# EAGLE board transmitter (EAGLE 7.2.0)
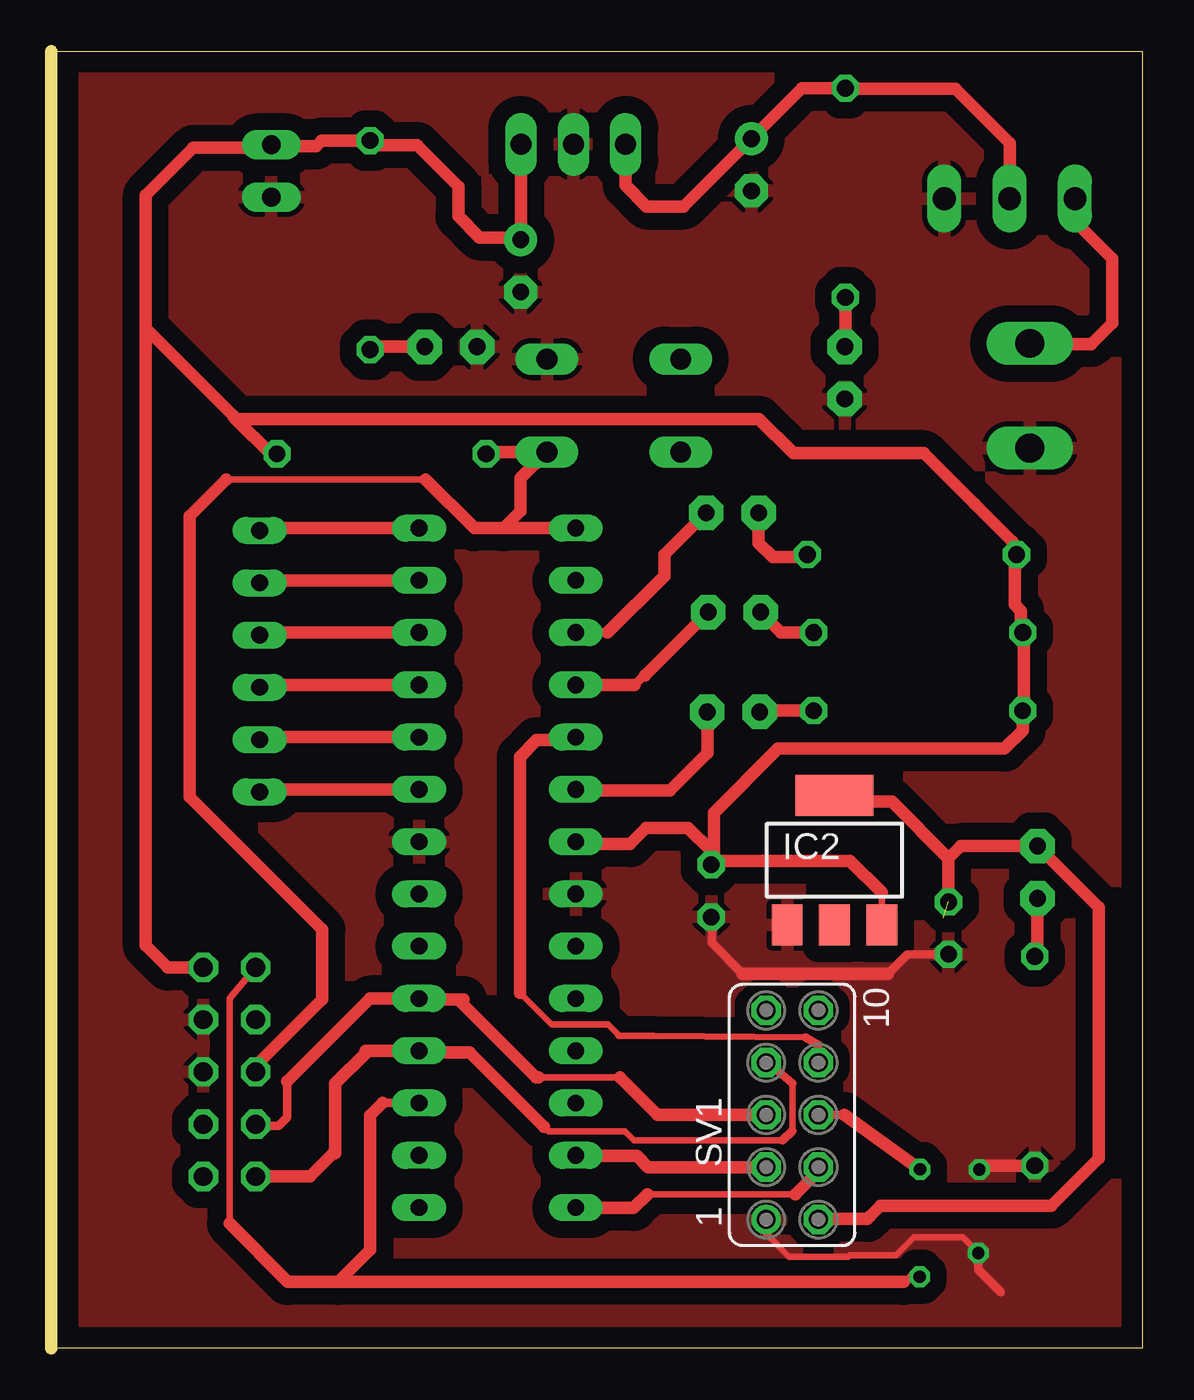
[diagram p0: board, top side]
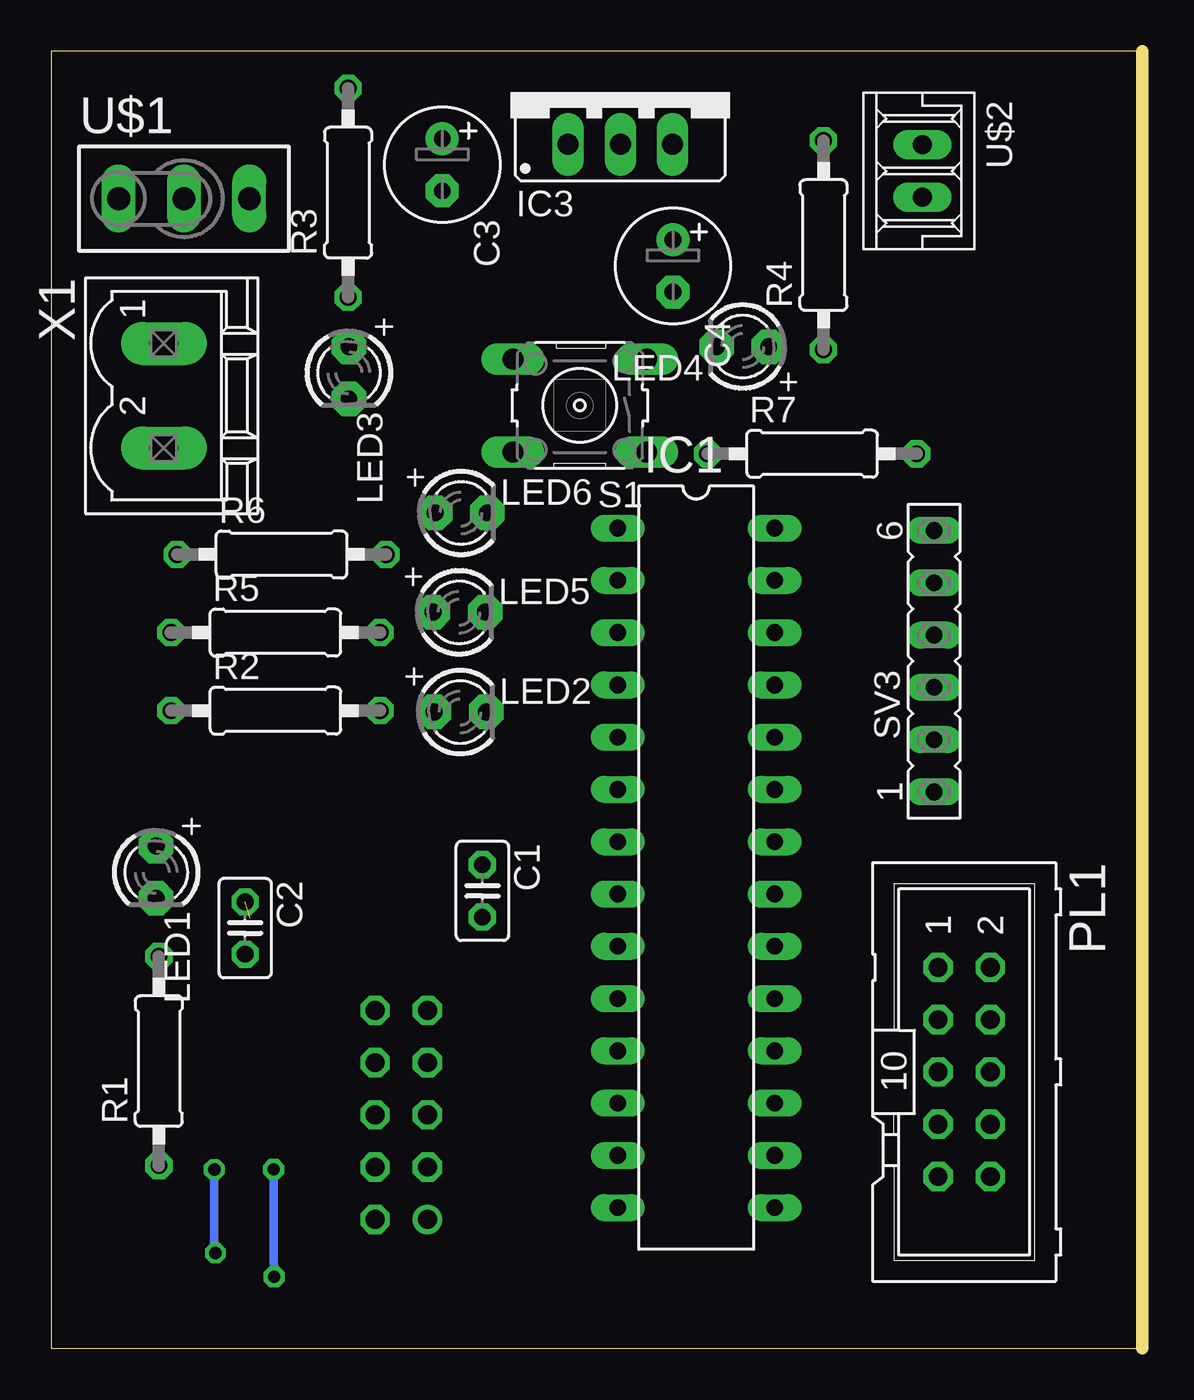
[diagram p1: board, bottom side, seen from below]

Size 53 x 63 mm. Coordinates in mm from the lower left corner, seen from the top.
Outline: 53,0 0,0 0,63 53,63 53,0
Copper layers (1*16): Top 0.035mm / dielectric 1.5mm / Bottom 0.035mm
Design rules "default": minimum track width 10mil, minimum drill 24mil, track to track 8mil, track to pad 8mil, pad to pad 8mil, via to via 8mil, smd to smd 8mil, copper to edge 40mil, drill to drill 8mil, minimum pad ring 10mil, minimum via ring 8mil, stop-mask expansion 4mil, vias tented up to drill 0mil, thermal gap 10mil

## Footprints (pad centres in the part's own frame; a part is rotated, then mirrored left to right if it is on the bottom)
C025-025X050 = drill 0.813 octagon: 1 -1.27,0; 2 1.27,0
E2,5-6 = drill 0.813 pad 1.6: + -1.27,0 | drill 0.813 pad 1.6 octagon: - 1.27,0
DIL28-3 = drill 0.813 long: 1 -16.51,-3.81; 2 -13.97,-3.81; 3 -11.43,-3.81; 4 -8.89,-3.81; 5 -6.35,-3.81; 6 -3.81,-3.81; 7 -1.27,-3.81; 8 1.27,-3.81; 9 3.81,-3.81; 10 6.35,-3.81; 11 8.89,-3.81; 12 11.43,-3.81; 13 13.97,-3.81; 14 16.51,-3.81; 15 16.51,3.81; 16 13.97,3.81; 17 11.43,3.81; 18 8.89,3.81; 19 6.35,3.81; 20 3.81,3.81; 21 1.27,3.81; 22 -1.27,3.81; 23 -3.81,3.81; 24 -6.35,3.81; 25 -8.89,3.81; 26 -11.43,3.81; 27 -13.97,3.81; 28 -16.51,3.81
SOT223 = smd 1.5 x 2: 1 -2.3,-3.15; 2 0,-3.15; 3 2.3,-3.15 | smd 3.8 x 2: 4 0,3.15
78XXS = drill 1.016 long: GND 0,-2.54; IN -2.54,-2.54; OUT 2.54,-2.54
LED3MM = drill 0.813 pad 1.676 octagon: A -1.27,0; K 1.27,0
ML10 = drill 0.914 octagon: 1 -5.08,-1.27; 2 -5.08,1.27; 3 -2.54,-1.27; 4 -2.54,1.27; 5 0,-1.27; 6 0,1.27; 7 2.54,-1.27; 8 2.54,1.27; 9 5.08,-1.27; 10 5.08,1.27
0207/10 = drill 0.813 octagon: 1 -5.08,0; 2 5.08,0
B3F-10XX = drill 1.016 long: 1 -3.251,2.261; 2 3.251,2.261; 3 -3.251,-2.261; 4 3.251,-2.261
FE05-2 = drill 0.914: 1 -5.08,1.27 | drill 0.914 octagon: 2 -5.08,-1.27; 3 -2.54,1.27; 4 -2.54,-1.27; 5 0,1.27; 6 0,-1.27; 7 2.54,1.27; 8 2.54,-1.27; 9 5.08,1.27; 10 5.08,-1.27
FE06 = drill 0.813 long: 1 -6.35,0; 2 -3.81,0; 3 -1.27,0; 4 1.27,0; 5 3.81,0; 6 6.35,0
SPDT = drill 1.1 pad 1.422 long: 1 -3.175,0; 2 0,0; 3 3.175,0
2PIN = drill 0.914 long: 1 -1.27,0; 2 1.27,0
MSTBV2 = drill 1.397 long: 1 -2.54,0; 2 2.54,0

## Placement (x,y rotation side)
C1  [C025-025X050]  32.06,22.21 270 bottom
C2  [C025-025X050]  43.59,20.4 270 bottom
C3  [E2,5-6]  34.01,57.49 270 bottom
C4  [E2,5-6]  22.8,52.58 270 bottom
IC1  MEGA8-P  [DIL28-3]  21.67,23.33 270 bottom
IC2  LD117AS12TR  [SOT223]  38.05,23.7 0 top
IC3  [78XXS]  25.36,61.02 0 bottom
LED1  [LED3MM]  47.92,23.12 270 bottom
LED2  [LED3MM]  33.14,30.91 0 bottom
LED3  [LED3MM]  38.55,47.39 270 bottom
LED4  [LED3MM]  19.41,48.66 180 bottom
LED5  [LED3MM]  33.19,35.76 0 bottom
LED6  [LED3MM]  33.09,40.58 0 bottom
PL1  [ML10]  8.65,13.41 270 bottom
R1  [0207/10]  47.78,13.94 90 bottom
R2  [0207/10]  42.11,30.97 0 bottom
R3  [0207/10]  38.58,56.14 90 bottom
R4  [0207/10]  15.49,53.59 90 bottom
R5  [0207/10]  42.12,34.77 0 bottom
R6  [0207/10]  41.82,38.56 0 bottom
R7  [0207/10]  16.04,43.45 0 bottom
S1  [B3F-10XX]  27.32,45.8 180 bottom
SV1  [FE05-2]  36,11.33 90 top
SV3  [FE06]  10.11,33.37 90 bottom
U$1  SLIDE_SWITCH  [SPDT]  46.56,55.85 0 bottom
U$2  2PIN  [2PIN]  10.68,57.19 270 bottom
X1  MSTBV2  [MSTBV2]  47.54,46.27 270 bottom

## Library data of the parts
C1-C4 R1-R7 = rcl
IC1 = atmel; OC_FARNELL: unknown; OC_NEWARK: unknown
IC2 IC3 = v-reg
LED1-LED6 = adafruit
PL1 = con-harting-ml; OC_FARNELL: unknown; OC_NEWARK: unknown
S1 = switch-omron; MPN: B3F-1000; OC_FARNELL: 176432; OC_NEWARK: 36M3542
SV1 SV3 = con-lsta; OC_FARNELL: unknown; OC_NEWARK: unknown
U$1 U$2 = RSC
X1 = con-phoenix-508; MPN: MSTBV 2,5/2-GF-5.08; OC_FARNELL: 1792792; OC_NEWARK: 69R9845

## Nets
AVCC: IC1.20
CE: IC1.13 SV1.3
GND: C1.2 C2.2 C3.- C4.- IC1.8 IC1.22 IC2.1 IC3.GND LED3.K LED4.K PL1.4 PL1.6 R1.1 S1.3 SV1.1 U$1.3 U$2.2 X1.2
IRQ: IC1.5 SV1.8
MISO: IC1.18 PL1.9 SV1.7
MOSI: IC1.17 PL1.1 SV1.6
N$1: IC1.23 SV3.1
N$2: LED5.A R5.2
N$3: LED6.A R6.2
N$4: IC1.24 SV3.2
N$5: IC1.25 SV3.3
N$6: IC1.26 SV3.4
N$7: IC1.27 SV3.5
N$8: IC1.28 SV3.6
N$9: LED1.K R1.2
N$10: LED2.A R2.2
N$11: C3.+ IC3.IN R3.2 U$1.2
N$12: U$1.1 X1.1
N$13: IC1.14 SV1.4
N$14: LED3.A R3.1
N$15: IC1.6 LED2.K
N$16: LED4.A R4.1
N$17: IC1.4 LED5.K
N$18: IC1.3 LED6.K
RST: IC1.1 PL1.5 R7.1 S1.1
SCK: IC1.19 PL1.7 SV1.5
VCC: C1.1 C4.+ IC1.7 IC2.3 IC3.OUT PL1.2 R2.1 R4.2 R7.2 U$2.1
VCC1: R5.1
VCC2: R6.1
VCC3.3: C2.1 IC2.4 LED1.A SV1.2

## Tracks (layer width: path | path; a pad name or v marks a point on that pad's centre or on a via)
CE
  Top 0.305: 25.51,9.34 IC1.13
  Top 0.406: 25.57,9.45 IC1.13
  Top 0.61: SV1.3 28.99,8.79 28.44,9.34 25.51,9.34
GND  (via drill 0.6)
  Top 0.305: SV1.1 34.73,5.55 35.84,4.44 38.72,4.44 38.78,4.5 41.03,4.5 41.9,5.38 44.28,5.38 v45.04,4.61
  Top 0.406: v45.04,4.61 45.04,3.81 46.14,2.71 | C2.2 41.59,19.13 40.64,18.18 | 33.58,18.18 32.09,19.68 32.09,20.91 C1.2
  Top 0.61: 40.64,18.18 33.58,18.18 | R1.1 45.29,8.86 v45.09,8.67
  Bottom 0.406: v45.09,8.67 45.09,4.66 v45.04,4.61
  pour Top (isolate 0.813): 56,53 56,61 53,64 -1,64 -6,59 -6,7 6,-5 46,-5 59,8 59,50
IRQ
  Top 0.305: SV1.8 37.27,14.73 | 36.63,15.11 29.29,15.16 27.56,15.16 27.56,15.22 27.05,15.73 24.3,15.73 22.76,17.26
  Top 0.406: 37.27,14.73 36.63,15.11
  Top 0.61: 22.76,17.26 22.76,28.73 23.57,29.54 25.34,29.54 IC1.5
MISO
  Top 0.305: 36.02,12.87 36.02,10.56 | 35.51,10.09 28.31,10.09 27.87,10.54 24.15,10.54 23.93,10.76
  Top 0.406: SV1.7 34.82,13.87 36.02,12.87 | 36.02,10.56 35.51,10.09 | 17.93,14.38 IC1.18 | 9.94,8.35 PL1.9
  Top 0.61: 23.93,10.76 20.31,14.38 17.93,14.38 | IC1.18 15.26,14.44 15.26,14.33 13.79,12.86 13.79,9.46 13.68,9.46 12.57,8.35 9.94,8.35
MOSI  (via drill 0.6)
  Top 0.305: 8.66,6.05 8.66,16.98 PL1.1 | v42.18,3.46 41.68,3.46 41.42,3.21
  Top 0.406: SV1.6 38.54,11.33 | IC1.17 16.08,11.9
  Top 0.61: 38.54,11.33 v42.2,8.68 | 41.42,3.21 13.93,3.21 | 13.93,3.21 11.47,3.21 8.66,6.05 | 16.08,11.9 15.5,11.31 15.5,4.77 13.93,3.21
  Bottom 0.406: v42.2,8.68 42.2,4.64 v42.18,3.46
N$1
  Top 0.406: 10.23,27.14 SV3.1
  Top 0.61: IC1.23 10.23,27.14
N$2
  Top 0.61: R5.2 35.45,34.77 LED5.A
N$3
  Top 0.406: R6.2 36.52,38.42
  Top 0.61: 36.52,38.42 35.05,38.42 34.36,39.12 LED6.A
N$4
  Top 0.406: 10.23,29.68 SV3.2
  Top 0.61: IC1.24 10.23,29.68
N$5
  Top 0.406: 10.23,32.22 SV3.3
  Top 0.61: IC1.25 10.23,32.22
N$6
  Top 0.406: 10.23,34.76 SV3.4
  Top 0.61: IC1.26 10.23,34.76
N$7
  Top 0.406: 10.23,37.3 SV3.5
  Top 0.61: IC1.27 10.23,37.3
N$8
  Top 0.406: 10.23,39.84 SV3.6
  Top 0.61: IC1.28 10.23,39.84
N$9
  Top 0.61: LED1.K 47.92,19.16 R1.2
N$10
  Top 0.61: R2.2 34.47,30.97 LED2.A
N$11
  Top 0.305: 34.08,58.84 C3.+
  Top 0.61: IC3.IN 27.9,56.49 28.93,55.47 30.71,55.47 C3.+ 36.46,61.22 R3.2 38.61,61.19 43.93,61.19 46.56,58.55 U$1.2
N$12
  Top 0.406: 47.57,48.79 X1.1
  Top 0.61: U$1.1 49.73,54.74 51.54,52.94 51.54,49.81 50.52,48.79 47.57,48.79
N$13
  Top 0.305: 36.15,7.47 28.96,7.47 | 25.5,6.8 IC1.14
  Top 0.61: SV1.4 37.27,8.58 36.15,7.47 | 28.96,7.47 28.29,6.8 25.5,6.8
N$14
  Top 0.61: R3.1 38.58,48.69 LED3.A
N$15
  Top 0.61: LED2.K 31.87,28.92 30.05,27.09 25.53,27.09 IC1.6
N$16
  Top 0.61: LED4.A 15.63,48.66 R4.1
N$17
  Top 0.406: 28.32,32.22 28.79,32.69 28.85,32.69
  Top 0.61: IC1.4 28.32,32.22 | 28.85,32.69 LED5.K
N$18
  Top 0.406: IC1.3 27.03,34.76
  Top 0.61: 27.03,34.76 29.78,37.52 29.78,38.55 LED6.K
RST
  Top 0.305: 18.19,42.2 8.48,42.2
  Top 0.61: IC1.1 21.97,39.84 | 21.97,39.84 20.55,39.84 18.19,42.2 | 8.48,42.2 6.72,40.44 6.72,40.43 6.72,26.77 13.15,20.34 13.15,16.93 9.92,13.7 PL1.5 | 21.97,39.84 22.8,40.68 22.8,42.27 S1.1 21.2,43.54 R7.1
SCK
  Top 0.305: 27.62,13.15 23.66,13.15 | 17.89,16.95 IC1.19
  Top 0.406: 11.46,12.96 11.46,11.21 11.04,10.79 10,10.79 PL1.7
  Top 0.61: SV1.5 29.44,11.33 27.62,13.15 | 19.76,16.95 17.89,16.95 | IC1.19 15.47,16.98 11.46,12.96 | 23.66,13.15 23.55,13.15 19.76,16.95 | 20.03,16.95 19.76,16.95
VCC
  Top 0.305: IC2.3 40.35,22.13 | 32.25,23.68 C1.1 | 22.69,53.96 C4.+ | 10.77,58.55 U$2.1
  Top 0.406: 32.19,23.61 C1.1 32.06,24.14 | 25.59,24.49 IC1.7 | 22.82,53.87 C4.+ | 10.53,58.31 U$2.1
  Top 0.61: 32.19,23.61 32.19,26 35.31,29.12 46.31,29.12 47.19,30 R2.1 47.25,31.03 47.25,34.69 47.11,34.83 47.11,35.82 46.81,36.12 46.81,38.6 46.92,38.49 46.92,38.32 46.89,38.35 46.89,38.95 46.7,39.15 46.7,39.17 44.88,41 44.87,41 42.39,43.48 36.05,43.48 34.39,45.15 8.96,45.15 | 32.06,24.14 30.93,25.27 28.89,25.27 28.11,24.49 25.59,24.49 | 40.35,22.13 38.8,23.68 32.25,23.68 | IC3.OUT 22.82,53.87 | 22.69,53.96 20.8,53.96 19.78,54.99 19.78,56.44 17.77,58.45 15.71,58.45 R4.2 13.13,58.67 12.85,58.39 10.75,58.39 U$2.1 | PL1.2 5.65,18.5 4.58,19.56 4.58,49.55 | 4.58,49.55 4.58,56.01 6.89,58.31 10.53,58.31 | 8.96,45.15 8.84,45.27 8.84,45.3 4.58,49.55 | R7.2 10.66,43.45 8.96,45.15
VCC3.3  (1 unrouted)
  Top 0.406: 38.36,26.55 IC2.4 | 39.77,6.41 39.64,6.28 | 37.3,6.28 SV1.2
  Top 0.61: C2.1 43.59,23.8 | 43.59,23.8 40.84,26.55 38.36,26.55 | 39.77,6.41 40.27,6.91 48.59,6.91 50.89,9.22 50.89,21.42 LED1.A 44.18,24.39 43.59,23.8 | 39.64,6.28 37.3,6.28